# Altium PCB roneCPUBoard-v15a.PcbDoc (part 1 of 3)
Units mil, origin at the board's own origin, x right, y up, seen from the top; angles counter-clockwise.
Board outline 3915.64 x 3915.87 mil, 2 copper layers (Top Layer, Bottom Layer), stack 61.2 mil thick; 219 components, 161 nets, 783 pads, 428 vias.
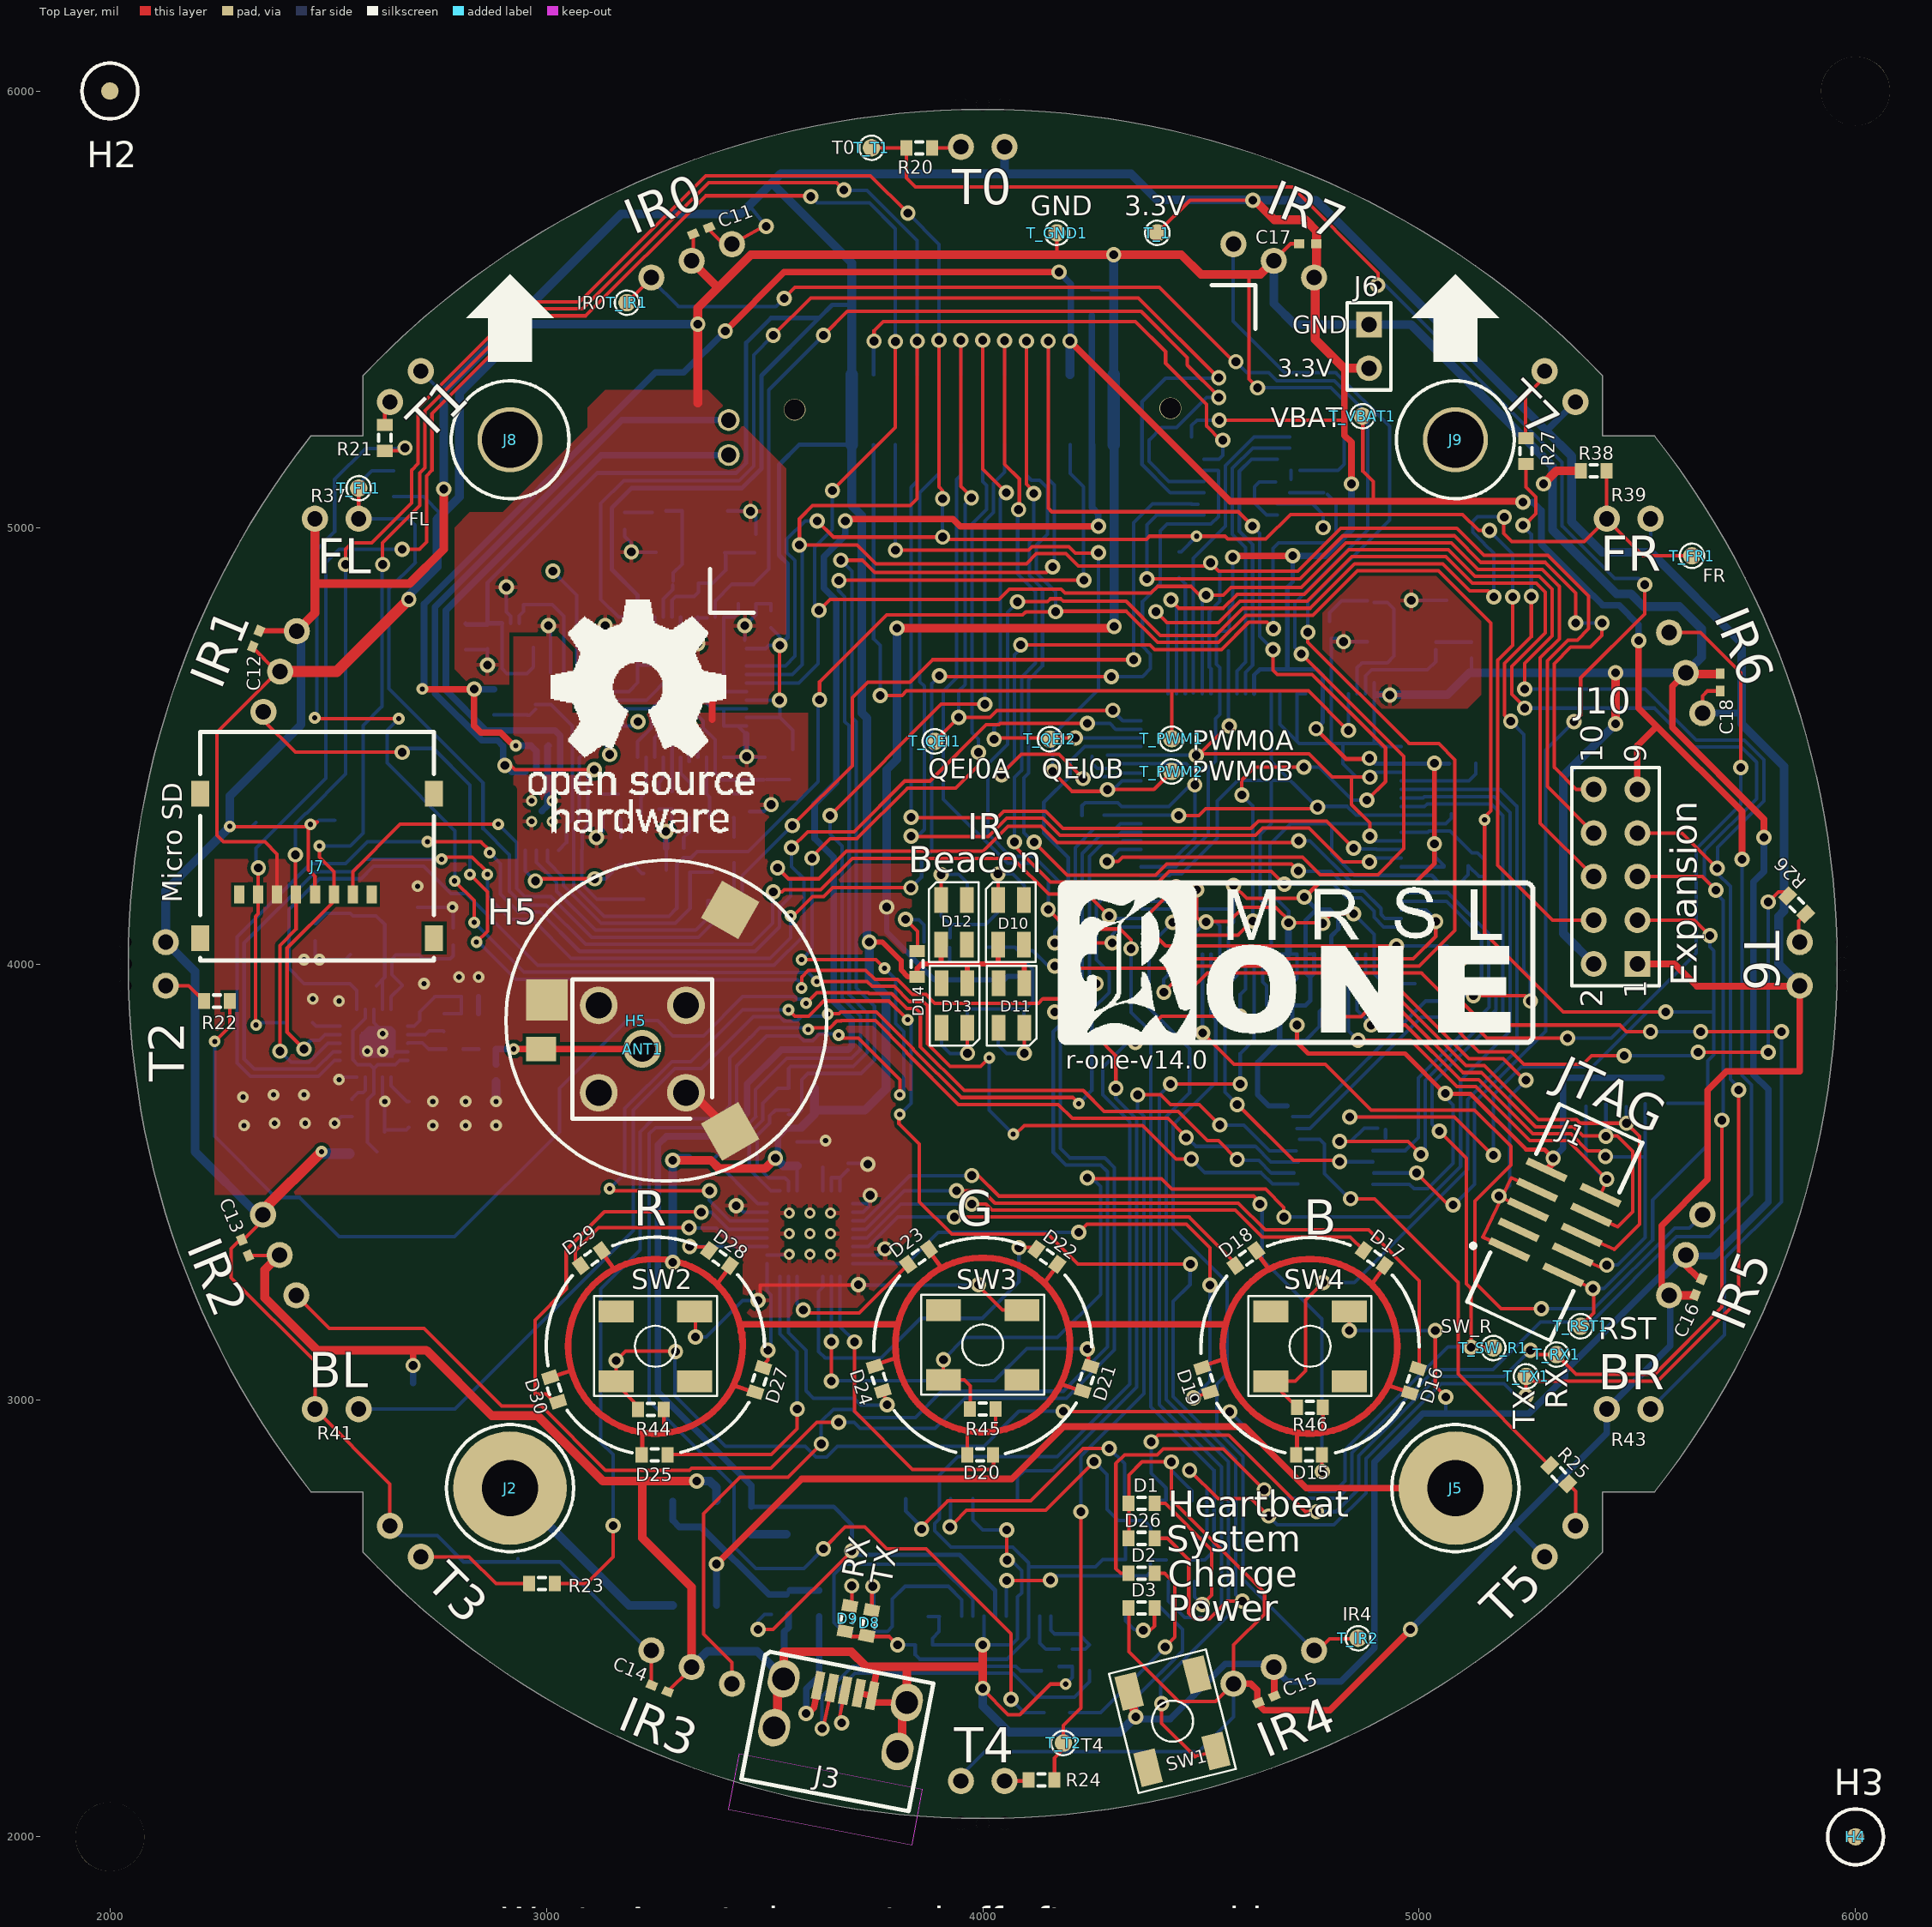
[diagram p0: Top Layer view]
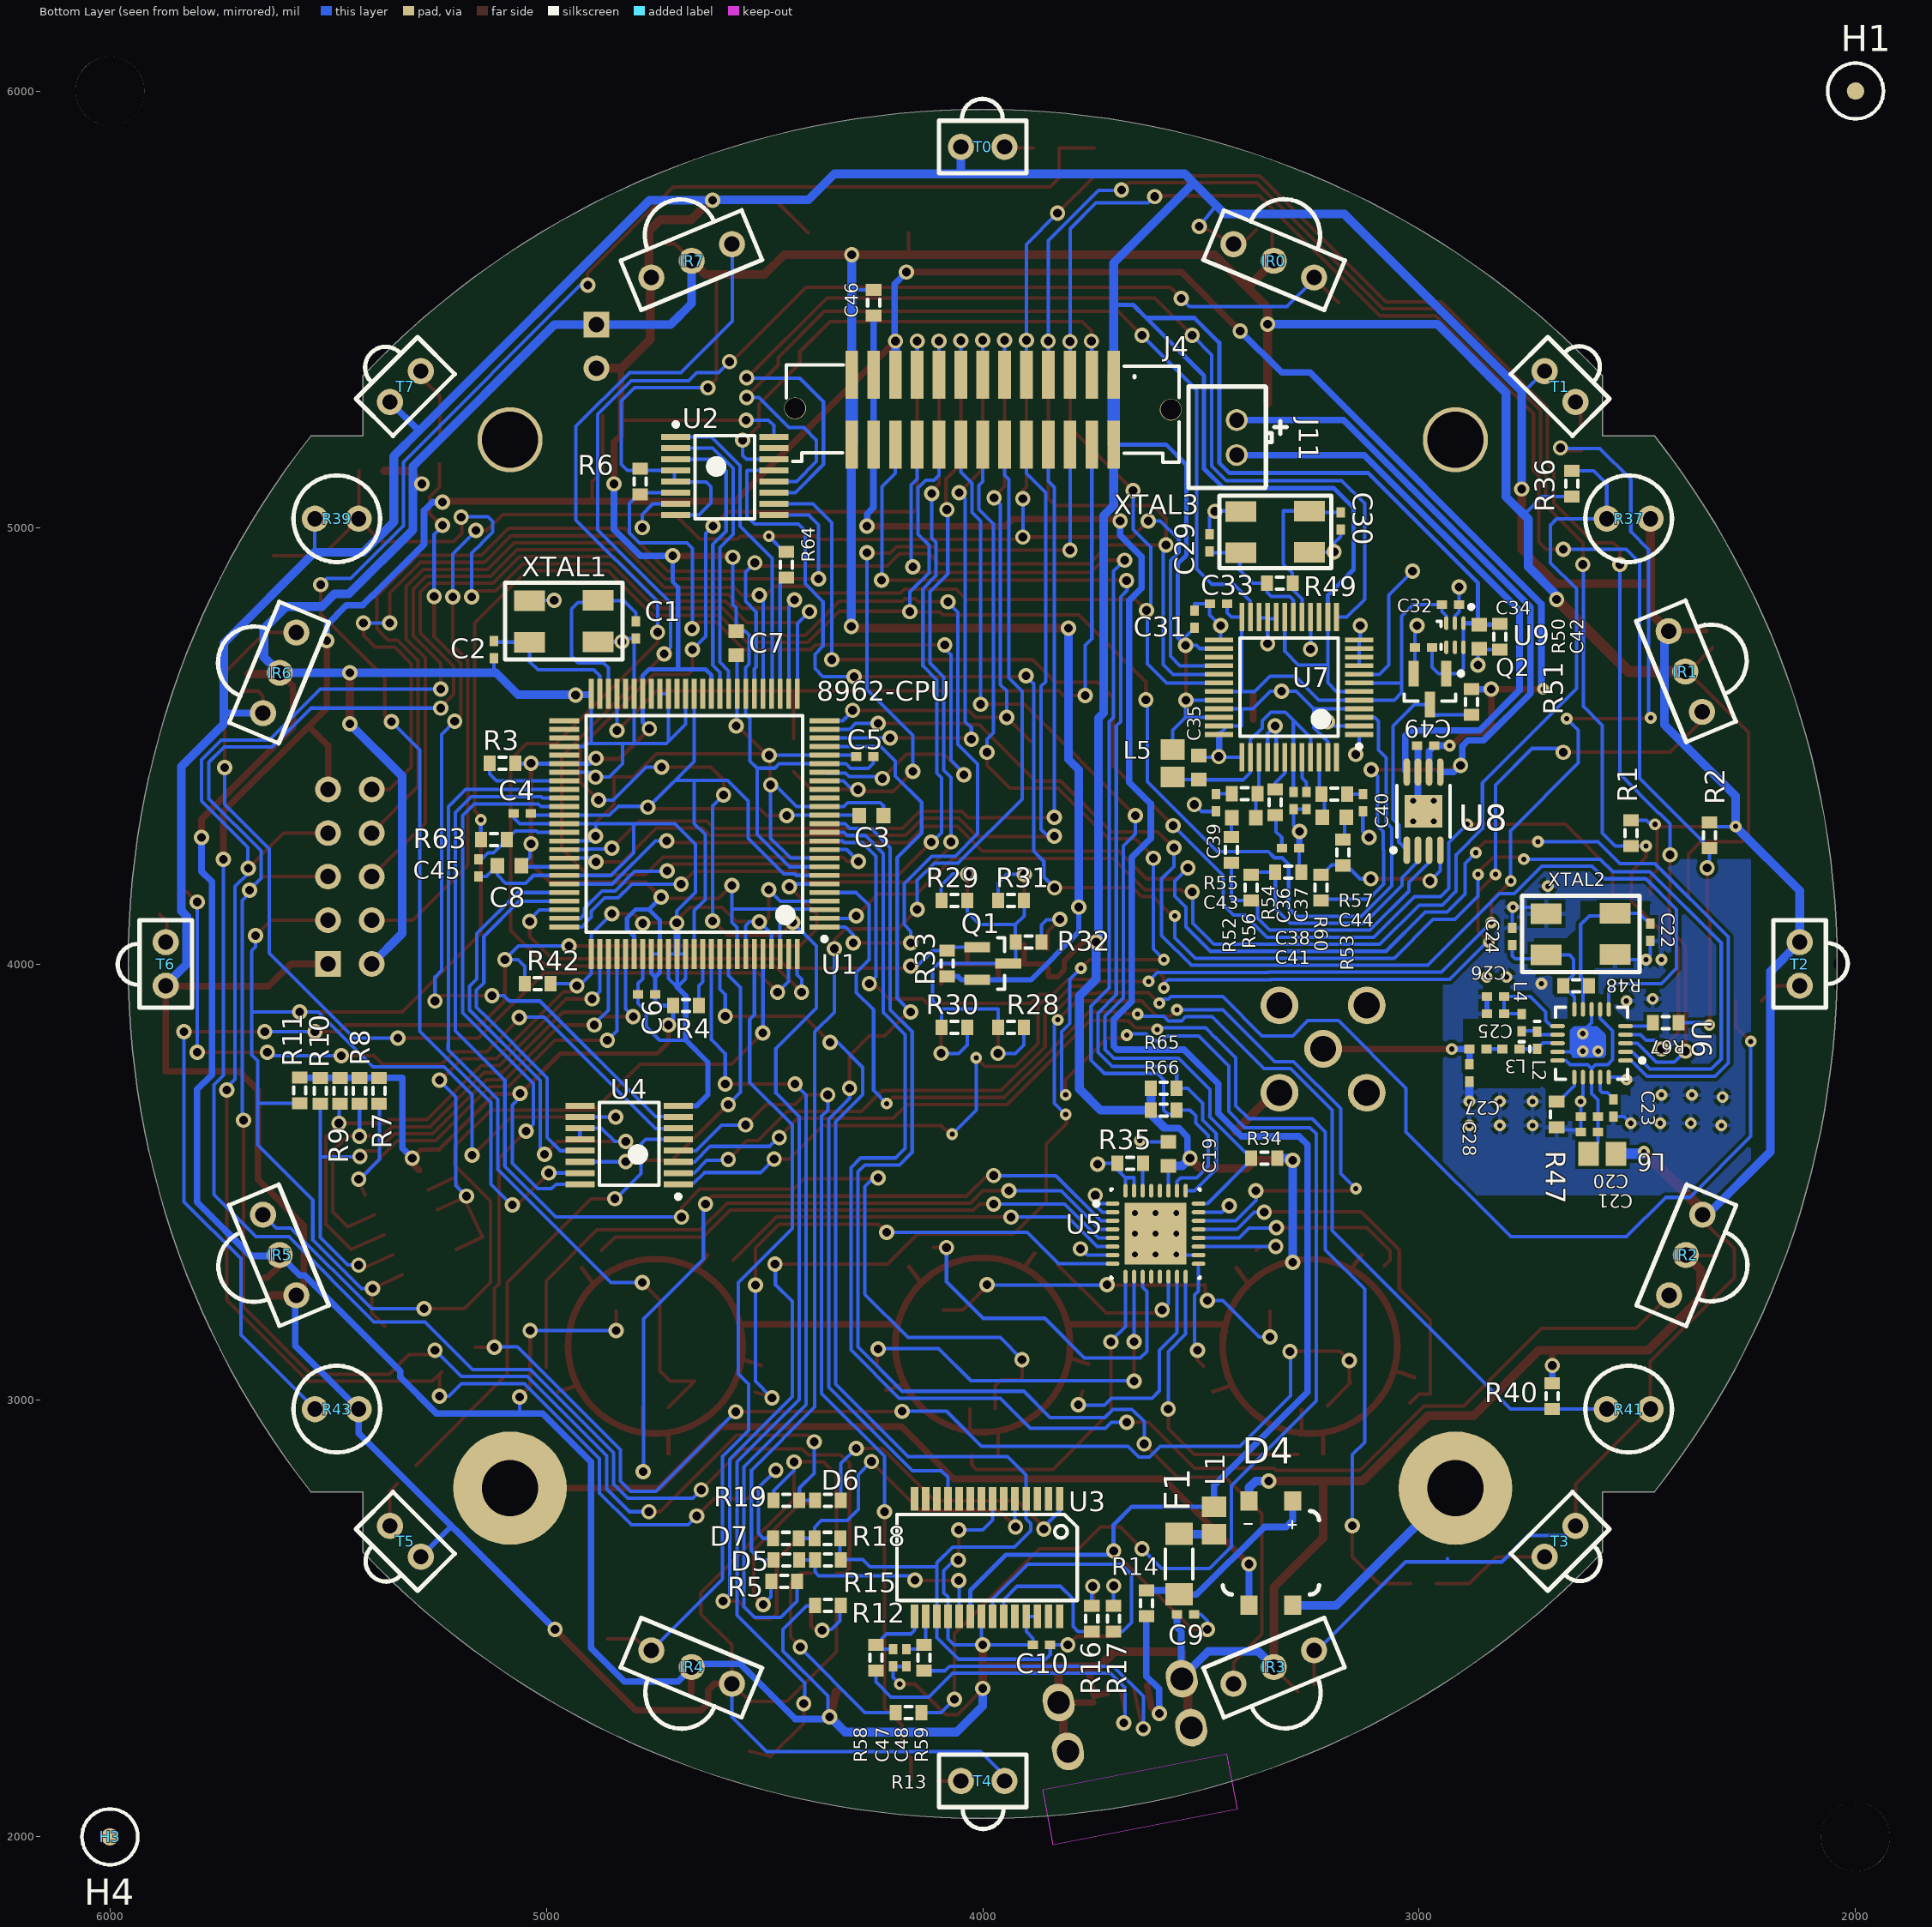
[diagram p1: Bottom Layer view, seen from below]

## Layer stack, top to bottom
Top Layer: signal copper 1.4
Dielectric: core 58.4, FR-4, Dk 4.8
Bottom Layer: signal copper 1.4

## Board outline
2461,2790 2580,2790 2580,2652 ccw(c4000,4000) 5420,2652 5420,2790 5539,2790 5539.56,2790.35 ccw(c4000,4000) 5539.56,5209.65 5539,5210 5420,5210 5420,5348 ccw(c4000,4000) 2580,5348 2580,5210 2461,5210 2460.99,5209.99 ccw(c4000,4000)

## Design rules (kind name [scope] priority, off if disabled: settings)
Clearance Via_Clearance [IsVia vs IsPad] p1: gap=20
Clearance [All] p2: gap=8
ComponentClearance "Schematic Component Clearance Constraint_2" [InComponent('H2')] p1: gap=0.5 collisioncheckmode=3 verticalgap=10 showdistances=FALSE
ComponentClearance "Schematic Component Clearance Constraint_3" [InComponent('H3')] p2: gap=0.5 collisioncheckmode=3 verticalgap=10 showdistances=FALSE
ComponentClearance "Schematic Component Clearance Constraint_1" [InComponent('H4')] p3: gap=0.5 collisioncheckmode=3 verticalgap=10 showdistances=FALSE
ComponentClearance "Schematic Component Clearance Constraint" [InComponent('H1')] p4: gap=0.5 collisioncheckmode=3 verticalgap=10 showdistances=FALSE
ComponentClearance Antclearance [InComponent('H5') vs InComponent('ANT1')] p5: gap=0 collisioncheckmode=3 verticalgap=0 showdistances=FALSE
ComponentClearance ComponentClearance_1 [All] p6: gap=3 collisioncheckmode=3 verticalgap=10 showdistances=FALSE
HoleSize [All] p1: absolutevalues=TRUE maxlimit=500 minlimit=1 maxpercent=80.000 minpercent=20.000
MinimumSolderMaskSliver [All] p1: minsoldermaskwidth=0
PolygonConnect [All] p1: connectstyle=Relief reliefconductorwidth=10 reliefentries=4 polygonreliefangle="90 Angle"
RoomDefinition TestPoints [InComponentClass('TestPoints')] p1: confinementstyle=ConfineIn formatcopy=TRUE lockcomponents=FALSE outline 0,0 2000,0 2000,1000 0,1000
RoomDefinition CPU [InComponentClass('CPU')] p2: confinementstyle=ConfineIn formatcopy=TRUE lockcomponents=FALSE outline 0,0 2000,0 2000,1000 0,1000
RoomDefinition USBHeaders [InComponentClass('USBHeaders')] p3: confinementstyle=ConfineIn formatcopy=TRUE lockcomponents=FALSE outline 0,0 2000,0 2000,1000 0,1000
RoomDefinition SoundChip [InComponentClass('SoundChip')] p4: confinementstyle=ConfineIn formatcopy=TRUE lockcomponents=FALSE outline 0,0 2000,0 2000,1000 0,1000
RoomDefinition Radio [InComponentClass('Radio')] p5: confinementstyle=ConfineIn formatcopy=TRUE lockcomponents=FALSE outline 0,0 2000,0 2000,1000 0,1000
RoomDefinition LightSensorsButtons [InComponentClass('LightSensorsButtons')] p6: confinementstyle=ConfineIn formatcopy=TRUE lockcomponents=FALSE outline 0,0 2000,0 2000,1000 0,1000
RoomDefinition LEDs [InComponentClass('LEDs')] p7: confinementstyle=ConfineIn formatcopy=TRUE lockcomponents=FALSE outline 0,0 2000,0 2000,1000 0,1000
RoomDefinition IRComms [InComponentClass('IRComms')] p8: confinementstyle=ConfineIn formatcopy=TRUE lockcomponents=FALSE outline 0,0 2000,0 2000,1000 0,1000
RoutingVias [All] p1: holewidth=20 width=35 viastyle="Through Hole" minholewidth=12 minwidth=27 maxholewidth=20 maxwidth=35
SMDNeckDown [All] p1: percent=400.000
SilkToSilkClearance [All] p1: silktosilkclearance=-10
SilkscreenOverComponentPads [All] p1: minsilkscreentomaskgap=0
SolderMaskExpansion [All] p1: expansion=4
Width "Schematic Width Constraint_5" [InNet('NetANT1_1')] p1: maxlimit=20 minlimit=8 preferedwidth=15 minimp=50.000000 maximp=50.000000 favimp=50.000000
Width "Schematic Width Constraint_13" [InNet('NetD4_1')] p2: maxlimit=20 minlimit=15 preferedwidth=15 minimp=50.000000 maximp=50.000000 favimp=50.000000
Width "Schematic Width Constraint_6" [InNet('NetF1_1')] p3: maxlimit=20 minlimit=15 preferedwidth=15 minimp=50.000000 maximp=50.000000 favimp=50.000000
Width "Schematic Width Constraint_8" [InNet('PRONG2')] p4: maxlimit=20 minlimit=8 preferedwidth=15 minimp=50.000000 maximp=50.000000 favimp=50.000000
Width "Schematic Width Constraint_3" [InNet('NetJ11_2')] p5: maxlimit=20 minlimit=8 preferedwidth=15 minimp=50.000000 maximp=50.000000 favimp=50.000000
Width "Schematic Width Constraint_11" [InNet('VBAT')] p6: maxlimit=20 minlimit=8 preferedwidth=15 minimp=50.000000 maximp=50.000000 favimp=50.000000
Width "Schematic Width Constraint_10" [InNet('GND')] p7: maxlimit=100 minlimit=8 preferedwidth=15 minimp=50.000000 maximp=50.000000 favimp=50.000000
Width "Schematic Width Constraint_9" [InNet('PRONG1')] p8: maxlimit=20 minlimit=8 preferedwidth=15 minimp=50.000000 maximp=50.000000 favimp=50.000000
Width "Schematic Width Constraint_2" [InNet('NetJ3_1')] p9: maxlimit=15 minlimit=8 preferedwidth=8 minimp=50.000000 maximp=50.000000 favimp=50.000000
Width "Schematic Width Constraint_1" [InNet('5VUSB')] p10: maxlimit=15 minlimit=8 preferedwidth=8 minimp=50.000000 maximp=50.000000 favimp=50.000000
Width "Schematic Width Constraint" [InNet('GND')] p11: maxlimit=15 minlimit=8 preferedwidth=8 minimp=50.000000 maximp=50.000000 favimp=50.000000
Width "Schematic Width Constraint_7" [InNet('3.3V')] p12: maxlimit=30 minlimit=8 preferedwidth=15 minimp=50.000000 maximp=50.000000 favimp=50.000000
Width "Schematic Width Constraint_4" [InNet('NetJ11_1')] p13: maxlimit=20 minlimit=8 preferedwidth=15 minimp=50.000000 maximp=50.000000 favimp=50.000000
Width [All] p14: maxlimit=8 minlimit=8 preferedwidth=8
23 further rules are at their usual default settings.

## Classes and differential pairs
component class SoundChip: C29 C30 C31 C32 C33 C34 C35 C36 C37 C38 C39 C40 C41 C42 C43 C44 C49 C? J11 L5 Q2 R49 R50 R51 R52 R53 R54 R55 R56 R57 R60 U7 U8 U9 XTAL3 XTAL100
component class Radio: ANT1 C20 C21 C22 C23 C24 C25 C26 C27 C28 H5 L2 L3 L4 L6 R47 R48 R67 U6 XTAL2
component class LEDs: C19 D15 D16 D17 D18 D19 D20 D21 D22 D23 D24 D25 D26 D27 D28 D29 D30 R34 R35 R65 R66 TP? U5
component class CPU: C1 C2 C3 C4 C5 C6 C7 C8 C45 D1 D? I2C IR_BEACON J1 "LED1 Power" "LED2 USB" "LED-H Blinky" LEDs R1 R2 R3 R4 R5 R6 R7 R8 R9 R10 R11 R63 R64 R? SPI SW? SW_RED U0 U1 U2 XTAL1 "XTAL 1"
component class IRComms: C11 C12 C13 C14 C15 C16 C17 C18 D10 D11 D12 D13 D14 IR0 IR1 IR2 IR3 IR4 IR5 IR6 IR7 Q1 R20 R21 R22 R23 R24 R25 R26 R27 R28 R29 R30 R31 R32 R33 T0 T1 T2 T3 T4 T5 T6 T7 U4
component class LightSensorsButtons: R36 R37 R38 R39 R40 R41 R42 R43 R44 R45 R46 SW2 SW3 SW4
component class USBHeaders: C9 C10 C46 C47 C48 D2 D3 D4 D5 D6 D7 D8 D9 F1 J2 J3 J4 J5 J6 J7 J8 J9 J10 L1 Q? R12 R13 R14 R15 R16 R17 R18 R19 R58 R59 SW1 U3 VDDC
component class TestPoints: FL H1 H2 H3 H4 T_1 T_FL1 T_FR1 T_GND1 T_IR1 T_IR2 T_PWM1 T_PWM2 T_QEI1 T_QEI2 T_RST1 T_RX1 T_SW_R1 T_T1 T_T2 T_TX1 T_VBAT1 TP17

## Components (designator, comment, footprint, x,y, rotation, side; value= is the part's Value field where it differs from the comment)
ANT1 "Ant" AntennaSMA 3220,3805 r0 top locked
C1 "Cap Semi" CAPC1005L#1 4795,4765 r90 bottom locked
C2 "Cap Semi" CAPC1005L#1 5120,4720 r90 bottom locked
C3 "Cap Semi" CAPC1608L 4255,4340 r0 bottom locked
C4 "Cap Semi" CAPC1005L#1 5055,4345 r180 bottom locked
C5 "Cap Semi" CAPC1005L#1 4270,4475 r180 bottom locked
C6 "Cap Semi" CAPC1005L#1 4770,3930 r180 bottom locked
C7 "Cap Semi" CAPC1608L 4565,4735 r90 bottom locked
C8 "Cap Semi" CAPC1608L 5085,4225 r180 bottom locked
C9 "" CAPC1005L#1 3535,2510 r180 bottom locked
C10 "" CAPC1005L#1 3865,2440 r180 bottom locked
C11 "Cap Semi" CAPC1005L#1 3355,5680 r22.5 top locked
C12 "Cap Semi" CAPC1005L#1 2335,4745 r67.5 top locked
C13 "Cap Semi" CAPC1005L#1 2310,3350 r112.5 top locked
C14 "Cap Semi" CAPC1005L#1 3260,2340 r157.5 top locked
C15 "Cap Semi" CAPC1005L#1 4650,2315 r202.5 top locked
C16 "Cap Semi" CAPC1005L#1 5640,3260 r247.5 top locked
C17 "Cap Semi" CAPC1005L#1 4745,5650 r0 top locked
C18 "Cap Semi" CAPC1005L#1 5690,4645 r270 top locked
C19 "Cap Semi" CAPC1608L 3575,3565 r270 bottom locked
C20 "Cap Semi" CAPC1005L#1 2610,3615 r180 bottom
C21 "Cap Semi" CAPC1005L#2 2610,3650 r180 top
C22 "Cap Semi" CAPC1005L#1 2470,4072.6 r90 bottom
C23 "Cap Semi" CAPC1005L#1 2555,3670 r90 bottom
C24 "Cap Semi" CAPC1005L#1 2786.81,4063.19 r270 bottom
C25 "Cap Semi" CAPC1005L#1 2825,3885.79 r180 bottom
C26 "Cap Semi" CAPC1005L#1 2825,3925 r180 bottom
C27 "Cap Semi" CAPC1005L#1 2865,3805 r180 bottom
C28 "Cap Semi" CAPC1005L#1 2885,3750 r90 bottom
C29 "Cap Semi" CAPC1005L#1 3480,4965 r90 bottom
C30 "Cap Semi" CAPC1005L#1 3180,5015 r270 bottom locked
C31 "Cap Semi" CAPC1005L#1 3515,4790 r270 bottom locked
C32 "Cap Semi" CAPC1005L#1 2990,4725 r180 bottom locked
C33 "Cap Semi" CAPC1005L#1 3460,4825 r180 bottom locked
C34 "Cap Semi" CAPC1005L#1 2928,4823 r0 bottom locked
C35 "Cap Semi" CAPC1608L 3505,4450 r90 bottom locked
C36 "Cap Semi" CAPC1005L#1 3288,4374 r90 bottom locked
C37 "Cap Semi" CAPC1005L#1 3258,4374 r90 bottom locked
C38 "Cap Semi" CAPC1005L#1 3295,4265 r180 bottom locked
C39 "Cap Semi" CAPC1005L#1 3466,4369 r270 bottom locked
C40 "Cap Semi" CAPC1005L#1 3129,4369 r270 bottom
C41 "Cap Semi" J1-0603 3300,4210 r0 bottom
C42 "Cap Semi" CAPC1608L 2862,4750 r270 bottom
C43 "Cap Semi" CAPC1608L 3402,4335 r180 bottom
C44 "Cap Semi" CAPC1608L 3194,4336 r0 bottom
C45 "Cap Semi" CAPC1005L#1 5155,4220 r90 bottom
C46 "Cap Semi" J1-0603 4250,5515 r270 bottom
C47 "Cap Semi" CAPC1005L#1 4205,2410 r90 bottom
C48 "Cap Semi" CAPC1005L#1 4175,2410 r90 bottom
C49 "Cap Semi" CAPC1005L#1 2985,4500 r180 bottom
D1 "Heartbeat" SurfaceMount(603) 4364,2764 r0 top locked
D2 "Charge" SurfaceMount(603) 4364,2604 r0 top locked
D3 "Power" SurfaceMount(603) 4364,2524 r0 top locked
D4 "CDBHM240L-HF" DIODEARRAY_2AMPS 3340,2650 r180 bottom locked
D5 "Diode" SurfaceMount(603) 4450,2634 r180 bottom locked
D6 "Diode" SurfaceMount(603) 4355,2771 r0 bottom locked
D7 "Diode" SurfaceMount(603) 4451,2684 r180 bottom locked
D8 "TXLED" SurfaceMount(603) 3740,2490 r79.1 top locked
D9 "RXLED" SurfaceMount(603) 3690,2500 r79.1 top locked
D10 "IR_LED_SFH4250" IR_LED_SFH4250 4065,4095 r180 top locked
D11 "IR_LED_SFH4250" IR_LED_SFH4250 4065,3905 r0 top locked
D12 "IR_LED_SFH4250" IR_LED_SFH4250 3935,4095 r180 top locked
D13 "IR_LED_SFH4250" IR_LED_SFH4250 3935,3905 r0 top locked
D14 "BEACON_PILOT" SurfaceMount(603) 3850,4000 r90 top
D15 "blue" SurfaceMount(603) 4748,2875 r0 top locked
D16 "blue" SurfaceMount(603) 4988,3045 r72 top locked
D17 "blue" SurfaceMount(603) 4897,3326 r144 top locked
D18 "blue" SurfaceMount(603) 4603,3326 r216 top locked
D19 "blue" SurfaceMount(603) 4512,3047 r288 top locked
D20 "green" SurfaceMount(603) 3994,2875 r0 top locked
D21 "green" SurfaceMount(603) 4238,3050 r72 top locked
D22 "green" SurfaceMount(603) 4147,3329 r144 top locked
D23 "green" SurfaceMount(603) 3853,3329 r216 top locked
D24 "green" SurfaceMount(603) 3762,3050 r288 top locked
D25 "red" SurfaceMount(603) 3248,2875 r0 top locked
D26 "System" SurfaceMount(603) 4364,2684 r0 top locked
D27 "red" SurfaceMount(603) 3488,3047 r72 top locked
D28 "red" SurfaceMount(603) 3397,3326 r144 top locked
D29 "red" SurfaceMount(603) 3103,3326 r216 top locked
D30 "red" SurfaceMount(603) 3018,3025 r288 top locked
F1 "PTC" ERJ8G-1206 3550,2625 r270 bottom locked
H1 "H_FID_F40" F40 2000,6000 r180 bottom
H2 "H_FID_F40" F40 2000,6000 r0 top
H3 "H_FID_F40" F40 6000,2000 r180 bottom
H4 "H_FID_F40" F40 6000,2000 r0 top
H5 "H_1513504-1_1513504-1" 1513504-1 3275,3870 r270 top
IR0 "GP1UX31QS" GP1UX31QS 3333,5611 r292.5 bottom locked
IR1 "GP1UX31QS" GP1UX31QS 2390,4670 r337.5 bottom locked
IR2 "GP1UX31QS" GP1UX31QS 2389,3333 r22.5 bottom locked
IR3 "GP1UX31QS" GP1UX31QS 3333,2389 r67.5 bottom locked
IR4 "GP1UX31QS" GP1UX31QS 4667,2389 r112.5 bottom locked
IR5 "GP1UX31QS" GP1UX31QS 5611,3333 r157.5 bottom locked
IR6 "GP1UX31QS" GP1UX31QS 5611,4667 r202.5 bottom locked
IR7 "GP1UX31QS" GP1UX31QS 4667,5611 r247.5 bottom locked
J1 "JTAG" JTAG-10 5311,3408 r245 top locked
J2 "Charge Prong" CHARGING_PRONG 2917,2799 r0 top locked
J3 "USB" "USB Minib (thru-hole)" 3685,2335 r79.1 top locked
J4 "HCOMM/MOT" "HeaderSM 13x2" 4000,5270 r270 bottom locked
J5 "Charge Prong" CHARGING_PRONG 5083,2799 r180 top locked
J6 "External Power" HDR1X2 4885,5465 r270 top
J7 "Micro_SD" MICRO_SD 2475,4270 r0 top locked
J8 "#4 Screw Hole" #4_Screw_Hole 2917,5201 r0 top locked
J9 "#4 Screw Hole" #4_Screw_Hole 5083,5201 r0 top locked
J10 "Header 5X2" HDR2X5 5500,4000 r90 top locked
J11 "Speaker" BatteryConnJST 3418,5206 r270 bottom locked
L1 "Inductor" INDC2012L 3470,2725 r90 bottom locked
L2 "Inductor" INDC1005AL 2730,3825 r270 bottom
L3 "Inductor" INDC1005AL 2790,3805 r0 bottom
L4 "Inductor" INDC1005AL 2765,3865 r90 bottom
L5 "Inductor" INDC2012L 3565,4460 r90 bottom
L6 "Inductor" INDC2012L 2580,3565 r180 bottom (schematic designator L5)
Q1 "Mosfet" SOT-23 3977,4001 r180 bottom locked
Q2 "N-MOSFET" SOT-23 2975,4630 r270 bottom locked
R1 "Res3" RESC1608L#1 2515,4300 r90 bottom
R2 "Res3" RESC1608L#1 2335,4295 r90 bottom
R3 "Res3" RESC1608L#1 5100,4460 r180 bottom locked
R4 "Res3" RESC1608L#1 4680,3905 r180 bottom locked
R5 "Res3" RESC1608L#1 4455,2585 r180 bottom locked
R6 "Res3" RESC1608L#1 4785,5105 r270 bottom locked
R7 "Res3" RESC1608L#1 5383,3709 r90 bottom locked
R8 "Res3" RESC1608L#1 5428,3709 r90 bottom locked
R9 "Res3" RESC1608L#1 5473,3709 r90 bottom locked
R10 "Res3" RESC1608L#1 5518,3709 r90 bottom locked
R11 "Res3" RESC1608L#1 5565,3710 r90 bottom
R12 "Res3" RESC1608L#1 4355,2530 r180 bottom locked
R13 "Res3" RESC1608L#1 4170,2285 r0 bottom
R14 "Res3" RESC1608L#1 3625,2535 r90 bottom locked
R15 "Res3" RESC1608L#1 4355,2634 r0 bottom locked
R16 "" RESC1608L#1 3750,2500 r90 bottom locked
R17 "" RESC1608L#1 3700,2500 r90 bottom locked
R18 "Res3" RESC1608L#1 4356,2684 r0 bottom locked
R19 "Res3" RESC1608L#1 4450,2771 r180 bottom locked
R20 "Res3" RESC1608L#1 3855,5870 r180 top locked
R21 "Res3" RESC1608L#1 2630,5205 r270 top locked
R22 "Res3" RESC1608L#1 2245,3915 r0 top
R23 "Res3" RESC1608L#1 2990,2580 r0 top
R24 "Res3" RESC1608L#1 4135,2130 r0 top locked
R25 "Res3" RESC1608L#1 5320,2830 r135 top locked
R26 "Res3" RESC1608L#1 5865,4135 r135 top locked
R27 "Res3" RESC1608L#1 5245,5175 r270 top locked
R28 "Res3" RESC1608L#1 3935,3855 r180 bottom locked
R29 "Res3" RESC1608L#1 4065,4145 r0 bottom locked
R30 "Res3" RESC1608L#1 4065,3855 r180 bottom locked
R31 "Res3" RESC1608L#1 3935,4145 r0 bottom locked
R32 "Res3" RESC1608L#1 3895,4050 r180 bottom locked
R33 "Res3" RESC1608L#1 4082,4001 r90 bottom locked
R34 "Res3" RESC1608L#1 3355,3555 r180 bottom locked
R35 "Res3" RESC1608L#1 3662,3543 r180 bottom locked
R36 "Res3" RESC1608L#1 2650,5100 r270 bottom
R37 "photoresistor" photoresistor 2520,5020 r90 bottom locked
R38 "Res3" RESC1608L#1 5400,5130 r180 top
R39 "photoresistor" photoresistor 5480,5020 r270 bottom locked
R40 "Res3" RESC1608L#1 2695,3010 r90 bottom locked
R41 "photoresistor" photoresistor 2520,2980 r90 bottom locked
R42 "Res3" RESC1608L#1 5020,3955 r180 bottom locked
R43 "photoresistor" photoresistor 5480,2980 r90 bottom locked
R44 "Res3" RESC1608L#1 3240,2979 r0 top locked
R45 "Res3" RESC1608L#1 4000,2980 r0 top locked
R46 "Res3" RESC1608L#1 4750,2984 r0 top locked
R47 "Res3" RESC1608L#2 2685,3655 r90 top
R48 "Res3" RESC1608L#1 2640,3950 r0 bottom
R49 "Res3" RESC1608L#1 3319,4872 r0 bottom locked
R50 "Res3" RESC1608L#1 2815,4750 r90 bottom
R51 "Res3" J1-0603 2880,4600 r90 bottom
R52 "Diff" RESC1608L#1 3430,4261 r270 bottom
R53 "Res3" RESC1608L#1 3175,4255 r270 bottom
R54 "Res3" RESC1608L#1 3330,4370 r270 bottom locked
R55 "Res3" RESC1608L#1 3400,4390 r0 bottom
R56 "Diff" RESC1608L#1 3385,4175 r90 bottom
R57 "Res3" RESC1608L#1 3194,4389 r180 bottom locked
R58 "Res3" RESC1608L#1 4245,2410 r270 bottom
R59 "Res3" RESC1608L#1 4135,2410 r270 bottom
R60 "Res3" RESC1608L#1 3225,4175 r90 bottom
R63 "Res3" RESC1608L#1 5120,4285 r180 bottom
R64 "Res3" RESC1608L#1 4450,4915 r270 bottom
R65 "Res3" RESC1608L#1 3585,3715 r0 bottom
R66 "Res3" RESC1608L#1 3585,3665 r0 bottom
R67 "Res3" RESC1608L#1 2435,3865 r180 bottom (schematic designator R48)
SW1 "PWR_BUTTON" SwitchTall-TL330 4435,2265 r104 top locked
SW2 "SW_RED" SwitchTall-TL330 3250,3124 r0 top locked
SW3 "SW_GREEN" SwitchTall-TL330 4000,3127 r0 top locked
SW4 "SW_BLUE" SwitchTall-TL330 4750,3124 r0 top locked
T0 "LN54" LN54 4000,5872 r270 bottom locked
T1 "LN54" LN54 2677,5323 r315 bottom locked
T2 "LN54" LN54 2128,4000 r0 bottom locked
T3 "LN54" LN54 2677,2677 r45 bottom locked
T4 "LN54" LN54 4000,2128 r90 bottom locked
T5 "LN54" LN54 5323,2677 r135 bottom locked
T6 "LN54" LN54 5872,4000 r180 bottom locked
T7 "LN54" LN54 5323,5323 r225 bottom locked
T_1 "3.3V" TestPoint#1 4400,5675 r90 top locked
T_FL1 "LIGHT_FL" TestPoint#1 2570,5090 r90 top locked
T_FR1 "LIGHT_FR" TestPoint#1 5625,4935 r90 top locked
T_GND1 "GND" TestPoint#1 4170,5675 r90 top locked
T_IR1 "IR_RECV_0" TestPoint#1 3185,5515 r90 top locked
T_IR2 "IR_RECV_4" TestPoint#1 4860,2455 r90 top locked
T_PWM1 "MOT0_PWMA" TestPoint#1 4433,4516 r90 top locked
T_PWM2 "MOT0_PWMB" TestPoint#1 4433,4441 r90 top locked
T_QEI1 "QEI_0A" TestPoint#1 3890,4510 r90 top locked
T_QEI2 "QEI_0B" TestPoint#1 4154,4515 r90 top locked
T_RST1 "Reset" TestPoint#1 5370,3170 r0 top locked
T_RX1 "FTDI_RX" TestPoint#1 5315,3105 r90 top locked
T_SW_R1 "SW_RED" TestPoint#1 5170,3120 r90 top locked
T_T1 "IR_EMIT_0" TestPoint#1 3745,5870 r90 top locked
T_T2 "IR_EMIT_4" TestPoint#2 4225,2260 r90 top
T_TX1 "FTDI_TX" TestPoint#1 5245,3055 r90 top locked
T_VBAT1 "VBAT" TestPoint#1 4870,5255 r90 top locked
U1 "LM3S8962" LQFP-100 4661,4321 r0 bottom locked
U2 "DEMUX" TSSOP-16 4591,5118 r180 bottom locked
U3 "FT232RL" SSOP-28 3990,2640 r0 bottom locked
U4 "SN74AHCT595" TSSOP-16 4810,3585 r0 bottom locked
U5 "TI_LED_DRIVER" QFN32-LEDTLC59116 3604,3382 r180 bottom locked
U6 "nRF24L01P" QFN-20 2605,3818.19 r0 bottom
U7 "VS1053" LQFP-48 3298,4634 r0 bottom locked
U8 "TPA741" "audio amp" 2990,4350 r90 bottom locked
U9 "1.8V LDO" WFDFN-6 2918,4753 r270 bottom locked
XTAL1 "8mhz" CRYSTAL 4960,4785 r0 bottom locked
XTAL2 "16mhz" CRYSTAL 2630,4068.19 r0 bottom
XTAL3 "12.288mhz" CRYSTAL 3330,4990 r180 bottom locked

## Footprints (in the part's own frame and the unit in brackets; to place one, negate y for a bottom-side part, rotate by r counter-clockwise, add the part's x,y. Pads: shape width x height; smd on the part's side, far side on the other; paste and mask are expansions set on the pad)
1513504-1 [mm]
  rect 1.4x1.74 smd: 1(1.651,-7.28)
  rect 2.5x2.5 smd rot 30: 2(6.443,3.72)
  rect 2.5x2.5 smd rot 150: 3(-6.443,3.72)
  rect 2.4x2.4 smd: 4(-1.2,-6.95)
  silkscreen extent -9.33,-9.33 9.33,9.33, body extent -7.97,-7.5 7.97,8.09, height 6
#4_Screw_Hole [mil] "#4 Screw Hole, 3.2766mm Hole Dia., Plated"
  round 149 hole 129: 1(0,0)
  silkscreen extent -135,-135 135,135
AntennaSMA [mm] "antenna for radios , tyco 108-11200"
  round 2.2 hole 1.511: 1(0.002,0.01) 2(-2.54,2.54) 3(2.54,2.54) 4(2.54,-2.54) 5(-2.54,-2.54)
  silkscreen extent -4.06,-4.06 4.06,4.06
"audio amp" [mm]
  oval 1.6x0.38 smd: 1(-2.275,0.975) 2(-2.275,0.325) 3(-2.275,-0.325) 4(-2.275,-0.975) 5(2.275,-0.975) 6(2.275,-0.325) 7(2.275,0.325) 8(2.275,0.975)
  rect 1.9x2.2 smd: 9(0,0)
  silkscreen extent -2.4,-1.55 1.5,1.88, body extent -1.55,-1.45 1.55,1.45, height 1.1
BatteryConnJST [mil] "Connector for Battery"
  round 50 hole 35: 1(-40,0) 2(40,0)
  silkscreen extent -117,-110 116,115
CAPC1005L#1 [mm] "Chip Capacitor, Body 1.0x0.5mm, IPC High Density"
  rect 0.6x0.5 smd: 1(-0.5,0) 2(0.5,0)
  body extent -0.55,-0.3 0.55,0.3, height 1.3
CAPC1005L#2 [mm] "Chip Capacitor, Body 1.0x0.5mm, IPC High Density"
  rect 0.6x0.5 smd far side: 1(-0.5,0) 2(0.5,0)
  body extent -0.55,-0.3 0.55,0.3, height 1.3
CAPC1608L [mm] "Chip Capacitor, Body 1.6x0.8mm, IPC High Density"
  rect 0.8x0.9 smd: 1(-0.7,0) 2(0.7,0)
  body extent -0.87,-0.48 0.87,0.48, height 1.3
CHARGING_PRONG [mil] "Plated Charging Screw Hole, 3.2766mm Hole Dia., 6.604mm Pad Dia."
  round 260 hole 129: 1(0,0)
  silkscreen extent -146,-146 146,146
CRYSTAL [mm]
  rect 1.8x1.2 smd: 1(-2,-1.213) 2(2,-1.187) 3(2,1.213) 4(-2,1.187)
  silkscreen extent -3.42,-2.24 3.41,2.22
DIODEARRAY_2AMPS [mm] "CDBHM240L-HF"
  rect 1x1.125 smd: 1(1.275,3.04) 2(-1.275,3.04) 3(1.275,-3.04) 4(-1.275,-3.04)
  silkscreen extent -2.79,-2.4 2.81,2.44, body extent -2.45,-2.11 2.45,2.08, height 2.7
ERJ8G-1206 [mm] "Chip Resistor, Body 3.2x1.6mm, IPC High Density"
  rect 1.3x1.6 smd: 1(-1.75,0) 2(1.75,0)
  silkscreen extent -0.86,-0.79 0.86,0.79, body extent -1.6,-0.79 1.6,0.79, height 0.9
F40 [mil]
  round 40 smd paste-1000 mask-1000: 1(0,0)
  Top Layer keep-out circle w8: c0,0 r64
  silkscreen extent -64,-64 64,64
GP1UX31QS [mil]
  round 60 hole 35: 1(0,100) 2(0,0) 3(0,-100)
  silkscreen extent -146,-150 60,150
HDR1X2 [mm] "Connector; Header; 2 Position"
  rect 1.5x1.5 hole 0.9: 1(0,0)
  round 1.5 hole 0.9: 2(2.54,0)
  silkscreen extent -1.27,-1.27 3.81,1.27
HDR2X5 [mm] "Connector; Header; 5x2 Position"
  rect 1.5x1.5 hole 0.9: 1(0,0)
  round 1.5 hole 0.9: 2(0,2.54) 3(2.54,0) 4(2.54,2.54) 5(5.08,0) 6(5.08,2.54) 7(7.62,0) 8(7.62,2.54) 9(10.16,0) 10(10.16,2.54)
  silkscreen extent -1.27,-1.27 11.43,3.81
"HeaderSM 13x2" [mm]
  rect 2.795x0.74 smd: 1(-2.033,7.62) 2(2.033,7.62) 3(-2.033,6.35) 4(2.033,6.35) 5(-2.033,5.08) 6(2.033,5.08) 7(-2.033,3.81) 8(2.033,3.81) 9(-2.033,2.54) 10(2.033,2.54) 11(-2.033,1.27) 12(2.033,1.27) 13(-2.033,0) 14(2.033,0) 15(-2.033,-1.27) 16(2.033,-1.27) 17(-2.033,-2.54) 18(2.033,-2.54) 19(-2.033,-3.81) 20(2.033,-3.81) 21(-2.033,-5.08) 22(2.033,-5.08) 23(-2.033,-6.35) 24(2.033,-6.35) 25(-2.033,-7.62) 26(2.033,-7.62)
  round 1.27 hole 1.19: c1(0,10.948) c2(-0.076,-10.922)
  silkscreen extent -2.59,-11.43 3.06,11.43
INDC1005AL [mm] "Chip Inductor, Body 1.0x0.5mm, IPC High Density"
  rect 0.6x0.5 smd: 1(-0.5,0) 2(0.5,0)
  silkscreen extent -1.1,-0.15 -1.1,0.15, body extent -0.55,-0.3 0.55,0.3, height 0.55
INDC2012L [mm] "Chip Inductor, Body 2.0x1.2mm, IPC High Density"
  rect 1.2x1.4 smd: 1(-0.8,0) 2(0.8,0)
  body extent -1.1,-0.7 1.1,0.7, height 0.55
IR_LED_SFH4250 [mm]
  rect 0.8x1.5 smd: 1(0.762,-1.3) 2(-0.738,-1.3) 3(-0.738,1.3) 4(0.762,1.3)
  silkscreen extent -1.42,-2.34 1.47,2.31
J1-0603 [mm] "Chip Resistor, Body 1.6x0.8mm, IPC High Density"
  rect 0.7x0.9 smd: 1(-0.75,0) 2(0.75,0)
  silkscreen extent -0.2,-0.35 0.2,0.35, body extent -0.85,-0.48 0.85,0.48, height 0.9
JTAG-10 [mm] "Connector, Socket Strip, Double Row, SMT, 20 Position, Vertical, Pitch 2mm, Body 20 x 4 mm (LxW)"
  rect 0.44x2.5 smd: 1(-2.56,-1.73) 2(-2.56,1.73) 3(-1.28,-1.73) 4(-1.28,1.73) 5(0,-1.73) 6(0,1.73) 7(1.28,-1.73) 8(1.28,1.73) 9(2.56,-1.73) 10(2.56,1.73)
  silkscreen extent -6.35,-3.86 6.35,2.67, body extent -6.35,-2.01 6.35,2.03, height 3.56
LN54 [mil]
  round 60 hole 35: 1(0,50) 2(0,-50)
  silkscreen extent -110,-100 60,100
LQFP-48 [mm] "sound chip (9x9mm)"
  rect 1.65x0.29 smd: 1(-4.075,2.75) 2(-4.075,2.25) 3(-4.075,1.75) 4(-4.075,1.25) 5(-4.075,0.75) 6(-4.075,0.25) 7(-4.075,-0.25) 8(-4.075,-0.75) 9(-4.075,-1.25) 10(-4.075,-1.75) 11(-4.075,-2.25) 12(-4.075,-2.75) 25(4.075,-2.75) 26(4.075,-2.25) 27(4.075,-1.75) 28(4.075,-1.25) 29(4.075,-0.75) 30(4.075,-0.25) 31(4.075,0.25) 32(4.075,0.75) 33(4.075,1.25) 34(4.075,1.75) 35(4.075,2.25) 36(4.075,2.75)
  rect 0.29x1.65 smd: 13(-2.75,-4.075) 14(-2.25,-4.075) 15(-1.75,-4.075) 16(-1.25,-4.075) 17(-0.75,-4.075) 18(-0.25,-4.075) 19(0.25,-4.075) 20(0.75,-4.075) 21(1.25,-4.075) 22(1.75,-4.075) 23(2.25,-4.075) 24(2.75,-4.075) 37(2.75,4.075) 38(2.25,4.075) 39(1.75,4.075) 40(1.25,4.075) 41(0.75,4.075) 42(0.25,4.075) 43(-0.25,4.075) 44(-0.75,4.075) 45(-1.25,4.075) 46(-1.75,4.075) 47(-2.25,4.075) 48(-2.75,4.075)
  silkscreen extent -4.2,-2.85 2.85,3.57, body extent -3.5,-3.5 3.5,3.5, height 1.6
LQFP-100 [mm] "100-Pin LQFP Package"
  rect 1.75x0.29 smd: 1(-7.575,6) 2(-7.575,5.5) 3(-7.575,5) 4(-7.575,4.5) 5(-7.575,4) 6(-7.575,3.5) 7(-7.575,3) 8(-7.575,2.5) 9(-7.575,2) 10(-7.575,1.5) 11(-7.575,1) 12(-7.575,0.5) 13(-7.575,0) 14(-7.575,-0.5) 15(-7.575,-1) 16(-7.575,-1.5) 17(-7.575,-2) 18(-7.575,-2.5) 19(-7.575,-3) 20(-7.575,-3.5) 21(-7.575,-4) 22(-7.575,-4.5) 23(-7.575,-5) 24(-7.575,-5.5) 25(-7.575,-6) 51(7.575,-6) 52(7.575,-5.5) 53(7.575,-5) 54(7.575,-4.5) 55(7.575,-4) 56(7.575,-3.5) 57(7.575,-3) 58(7.575,-2.5) 59(7.575,-2) 60(7.575,-1.5) 61(7.575,-1) 62(7.575,-0.5) 63(7.575,0) 64(7.575,0.5) 65(7.575,1) 66(7.575,1.5) 67(7.575,2) 68(7.575,2.5) 69(7.575,3) 70(7.575,3.5) 71(7.575,4) 72(7.575,4.5) 73(7.575,5) 74(7.575,5.5) 75(7.575,6)
  rect 0.29x1.75 smd: 26(-6,-7.575) 27(-5.5,-7.575) 28(-5,-7.575) 29(-4.5,-7.575) 30(-4,-7.575) 31(-3.5,-7.575) 32(-3,-7.575) 33(-2.5,-7.575) 34(-2,-7.575) 35(-1.5,-7.575) 36(-1,-7.575) 37(-0.5,-7.575) 38(0,-7.575) 39(0.5,-7.575) 40(1,-7.575) 41(1.5,-7.575) 42(2,-7.575) 43(2.5,-7.575) 44(3,-7.575) 45(3.5,-7.575) 46(4,-7.575) 47(4.5,-7.575) 48(5,-7.575) 49(5.5,-7.575) 50(6,-7.575) 76(6,7.575) 77(5.5,7.575) 78(5,7.575) 79(4.5,7.575) 80(4,7.575) 81(3.5,7.575) 82(3,7.575) 83(2.5,7.575) 84(2,7.575) 85(1.5,7.575) 86(1,7.575) 87(0.5,7.575) 88(0,7.575) 89(-0.5,7.575) 90(-1,7.575) 91(-1.5,7.575) 92(-2,7.575) 93(-2.5,7.575) 94(-3,7.575) 95(-3.5,7.575) 96(-4,7.575) 97(-4.5,7.575) 98(-5,7.575) 99(-5.5,7.575) 100(-6,7.575)
  silkscreen extent -7.7,-6.3 6.3,6.82, body extent -7,-7 7,7, height 1.6
MICRO_SD [mm]
  rect 0.6x1.05 smd: 1(3.17,-2.82) 2(2.07,-2.82) 3(0.97,-2.82) 4(-0.13,-2.82) 5(-1.23,-2.82) 6(-2.33,-2.82) 7(-3.43,-2.82) 8(-4.53,-2.82)
  rect 1.05x1.5 smd: ""(-6.8,-5.35) ""(-6.8,3.05) ""(6.8,-5.35) ""(6.8,3.05)
  silkscreen extent -6.8,-6.65 6.8,6.65
photoresistor [mil]
  round 60 hole 35: 1(0,50) 2(0,-50)
  silkscreen extent -99,-99 99,99
QFN32-LEDTLC59116 [mm] "QFN, 32-Leads, Body 5.2x5.2mm (max), Pitch 0.50mm, IPC Medium Density"
  oval 0.8x0.25 smd: 1(-2.5,1.75) 2(-2.5,1.25) 3(-2.5,0.75) 4(-2.5,0.25) 5(-2.5,-0.25) 6(-2.5,-0.75) 7(-2.5,-1.25) 8(-2.5,-1.75) 17(2.5,-1.75) 18(2.5,-1.25) 19(2.5,-0.75) 20(2.5,-0.25) 21(2.5,0.25) 22(2.5,0.75) 23(2.5,1.25) 24(2.5,1.75)
  oval 0.25x0.8 smd: 9(-1.75,-2.5) 10(-1.25,-2.5) 11(-0.75,-2.5) 12(-0.25,-2.5) 13(0.25,-2.5) 14(0.75,-2.5) 15(1.25,-2.5) 16(1.75,-2.5) 25(1.75,2.5) 26(1.25,2.5) 27(0.75,2.5) 28(0.25,2.5) 29(-0.25,2.5) 30(-0.75,2.5) 31(-1.25,2.5) 32(-1.75,2.5)
  rect 3.6x3.6 smd: 33(0,0)
  silkscreen extent -3.58,-2.6 2.6,2.6, body extent -2.58,-2.57 2.57,2.58, height 1
QFN-20 [mm] "QFN, 20-Leads, Body 4.2x4.2mm (max), Pitch 0.50mm, IPC Medium Density"
  oval 0.85x0.25 smd: 1(-1.975,1) 2(-1.975,0.5) 3(-1.975,0) 4(-1.975,-0.5) 5(-1.975,-1) 11(1.975,-1) 12(1.975,-0.5) 13(1.975,0) 14(1.975,0.5) 15(1.975,1)
  oval 0.25x0.85 smd: 6(-1,-1.975) 7(-0.5,-1.975) 8(0,-1.975) 9(0.5,-1.975) 10(1,-1.975) 16(1,1.975) 17(0.5,1.975) 18(0,1.975) 19(-0.5,1.975) 20(-1,1.975)
  silkscreen extent -3.07,-2.1 2.1,2.1, body extent -2.07,-2.07 2.07,2.07, height 0.8
RESC1608L#1 [mm] "Chip Resistor, Body 1.6x0.8mm, IPC High Density"
  rect 0.7x0.9 smd: 1(-0.75,0) 2(0.75,0)
  silkscreen extent -0.2,-0.35 0.2,0.35, body extent -0.85,-0.48 0.85,0.48, height 0.9
RESC1608L#2 [mm] "Chip Resistor, Body 1.6x0.8mm, IPC High Density"
  rect 0.7x0.9 smd far side: 1(-0.75,0) 2(0.75,0)
  body extent -0.85,-0.48 0.85,0.48, height 0.9
SOT-23 [mm] "SOT23, 3-Leads, Body 3.0x2.5mm (max), Pitch 0.95mm, IPC Medium Density"
  rect 1.5x0.6 smd: 1(-0.9,0.95) 2(-0.9,-0.95) 3(0.9,0)
  silkscreen extent 0.3,-1.5 0.7,1.5, body extent -0.7,-1.5 0.7,1.5, height 1.2
SSOP-28 [mm]
  rect 0.44x1.37 smd: 1(-4.225,-3.415) 2(-3.575,-3.415) 3(-2.925,-3.415) 4(-2.275,-3.415) 5(-1.625,-3.415) 6(-0.975,-3.415) 7(-0.325,-3.415) 8(0.325,-3.415) 9(0.975,-3.415) 10(1.625,-3.415) 11(2.275,-3.415) 12(2.925,-3.415) 13(3.575,-3.415) 14(4.225,-3.415) 15(4.225,3.415) 16(3.575,3.415) 17(2.925,3.415) 18(2.275,3.415) 19(1.625,3.415) 20(0.975,3.415) 21(0.325,3.415) 22(-0.325,3.415) 23(-0.975,3.415) 24(-1.625,3.415) 25(-2.275,3.415) 26(-2.925,3.415) 27(-3.575,3.415) 28(-4.225,3.415)
  silkscreen extent -5.25,-2.5 5.25,2.5
SurfaceMount(603) [mm]
  rect 0.7x0.9 smd: 1(-0.75,0) 2(0.75,0)
  silkscreen extent -0.2,-0.35 0.2,0.35, body extent -0.85,-0.48 0.85,0.48, height 0.9
SwitchTall-TL330 [mil] "Small SMDTall Tact Switch E-Switch TL330"
  rect 80x50 smd: 1(-90,80) 2(90,80) 3(-90,-80) 4(90,-80)
  silkscreen extent -141,-114 141,115
TestPoint#1 [mil]
  round 40 smd: 1(0,0)
  silkscreen extent -28,-28 28,28
TestPoint#2 [mil]
  round 40 smd: 1(-45,40)
  silkscreen extent -73,12 -17,68
TSSOP-16 [mm] "DEMUX & SHIFT REGISTER"
  rect 1.7x0.35 smd: 1(-2.85,2.275) 2(-2.85,1.625) 3(-2.85,0.975) 4(-2.85,0.325) 5(-2.85,-0.325) 6(-2.85,-0.975) 7(-2.85,-1.625) 8(-2.85,-2.275) 9(2.85,-2.275) 10(2.85,-1.625) 11(2.85,-0.975) 12(2.85,-0.325) 13(2.85,0.325) 14(2.85,0.975) 15(2.85,1.625) 16(2.85,2.275)
  silkscreen extent -2.98,-2.49 1.73,3.12, body extent -2.25,-2.55 2.25,2.55, height 1.2
"USB Minib (thru-hole)" [mm]
  rect 1.65x0.55 smd: 1(0,1.6) 2(0,0.8) 3(0,0) 4(0,-0.8) 5(0,-1.6)
  oval 2.2x1.8 hole 1.321: 6(0,3.65) 7(-2.9,3.65) 8(-2.9,-3.65) 9(0,-3.65)
  Keep-Out Layer region: -8.077,-5.512 -4.8,-5.512 -4.8,5.385 -8.077,5.385
  silkscreen extent -6.2,-4.95 1.39,4.95
WFDFN-6 [mm] "QFN, 6-Leads, Body 1.5x1.5mm (max), Pitch 0.50mm, IPC Medium Density"
  oval 0.8x0.25 smd: 1(-0.7,0.5) 2(-0.7,0) 3(-0.7,-0.5) 4(0.7,-0.5) 5(0.7,0) 6(0.7,0.5)
  silkscreen extent -1.76,-1.02 0.8,1.06, body extent -0.78,-0.77 0.77,0.78, height 0.8

## Part data
ANT1: library part AntennaConn
C1 C2 C3 C4 C5 C6 C7 C8 C11 C12 C13 C14 C15 C16 C17 C18 C19 C20 C21 C22 C23 C24 C25 C26 C27 C28 C29 C30 C31 C32 C33 C34 C35 C36 C37 C38 C39 C40 C41 C42 C43 C44 C45 C46 C47 C48 C49: "Capacitor (Semiconductor SIM Model)"
C9 C10: library part Cap, "Capacitor"
D1 D3 D14 D15 D16 D17 D18 D19 D20 D21 D22 D23 D24 D25 D26 D27 D28 D29 D30: library part LED
D2 D8 D9: library part LED2, "Typical RED, GREEN, YELLOW, AMBER GaAs LED"
D4: library part DiodeArray2Amps
D5 D6 D7: library part SchottkeyDiode
F1: library part PTC_FUSE, "Fuse"
H1 H2 H3 H4: library part H00083
J1: library part "Header 5X2H", "Header, 5-Pin, Dual row, Right Angle"
J2 J5: library part CHARGE_PRONG, "Charging Prong Hole with Plating"
J3: library part USB-ConnTH
J4: library part HCOMM/HMOT, "Header, 2X20, 50mil, IDC"
J6: library part "Header 2", "Header, 2-Pin"
J7: library part MICRO_SD
J8 J9: library part Mechanical_Hole, "A mechanical hole for mounting the board"
J10: "Header, 5-Pin, Dual row"
J11: library part BatteryConnJST
Q2: library part N-Mosfet
R1 R2 R3 R4 R5 R6 R7 R8 R9 R10 R11 R12 R13 R14 R15 R18 R19 R20 R21 R22 R23 R24 R25 R26 R27 R28 R29 R30 R31 R32 R33 R34 R35 R36 R38 R40 R42 R44 R45 R46 R47 R48 R49 R50 R51 R53 R54 R55 R57 R58 R59 R60 R63 R64 R65 R66 R67: "Resistor"
R16 R17: library part Res1, "Resistor"
R52 R56: library part Res3, "Resistor"
SW1 SW2 SW3 SW4: library part Switch-TL330
T_1 T_FL1 T_FR1 T_GND1 T_IR1 T_IR2 T_PWM1 T_PWM2 T_QEI1 T_QEI2 T_RST1 T_RX1 T_SW_R1 T_T1 T_T2 T_TX1 T_VBAT1: library part TestPoint
U4: "shift register"
U5: library part TLC59116LEDDRIVER
U6: library part radio-nRF24L01P
U8: library part "Audio Amp TPA741"
U9: library part 1.8V_LDO
XTAL1 XTAL2 XTAL3: library part Crystal

## Free pads (board coordinates)
  round 30 hole 31 unplated: 0(2034,3950) 0(3950,5970) 0(4050,2031) 0(5970,4050) 1(2034,4050) 1(3950,2031) 1(4050,5970) 1(5970,3950) 2(2035,4000) 2(4000,2030) 2(4000,5970) 2(5970,4000)
  round 158 hole 158 unplated: 5(2000,2000) 5(6000,6000)

## Via types
v1: diameter 35, hole 20, Top Layer to Bottom Layer, tented top, 333 vias
v2: diameter 27, hole 12, Top Layer to Bottom Layer, 65 vias
v3: diameter 35, hole 20, Top Layer to Bottom Layer, 14 vias
v4: diameter 25.98, hole 12.99, Top Layer to Bottom Layer, tented top, 13 vias
v5: diameter 25.98, hole 12.99, Top Layer to Bottom Layer, tented both sides, 3 vias

## Text inside footprints (layer, text, board x,y; h text height)
J10: Top Overlay "2" at 5420,3900 h50 r90; Top Overlay "1" at 5520,3920 h50 r90; Top Overlay "9" at 5520,4460 h50 r90; Top Overlay "10" at 5420,4460 h50 r90